# Altium PCB Wearable_sensor_v2.0.PcbDoc
Units mm, origin at the board's own origin, x right, y up, seen from the top; angles counter-clockwise.
Board outline 33.5 x 18 mm, 4 copper layers (Top Layer, Layer 1, Layer 2, Bottom Layer), stack 0.66 mm thick; 54 components, 44 nets, 210 pads, 318 vias.
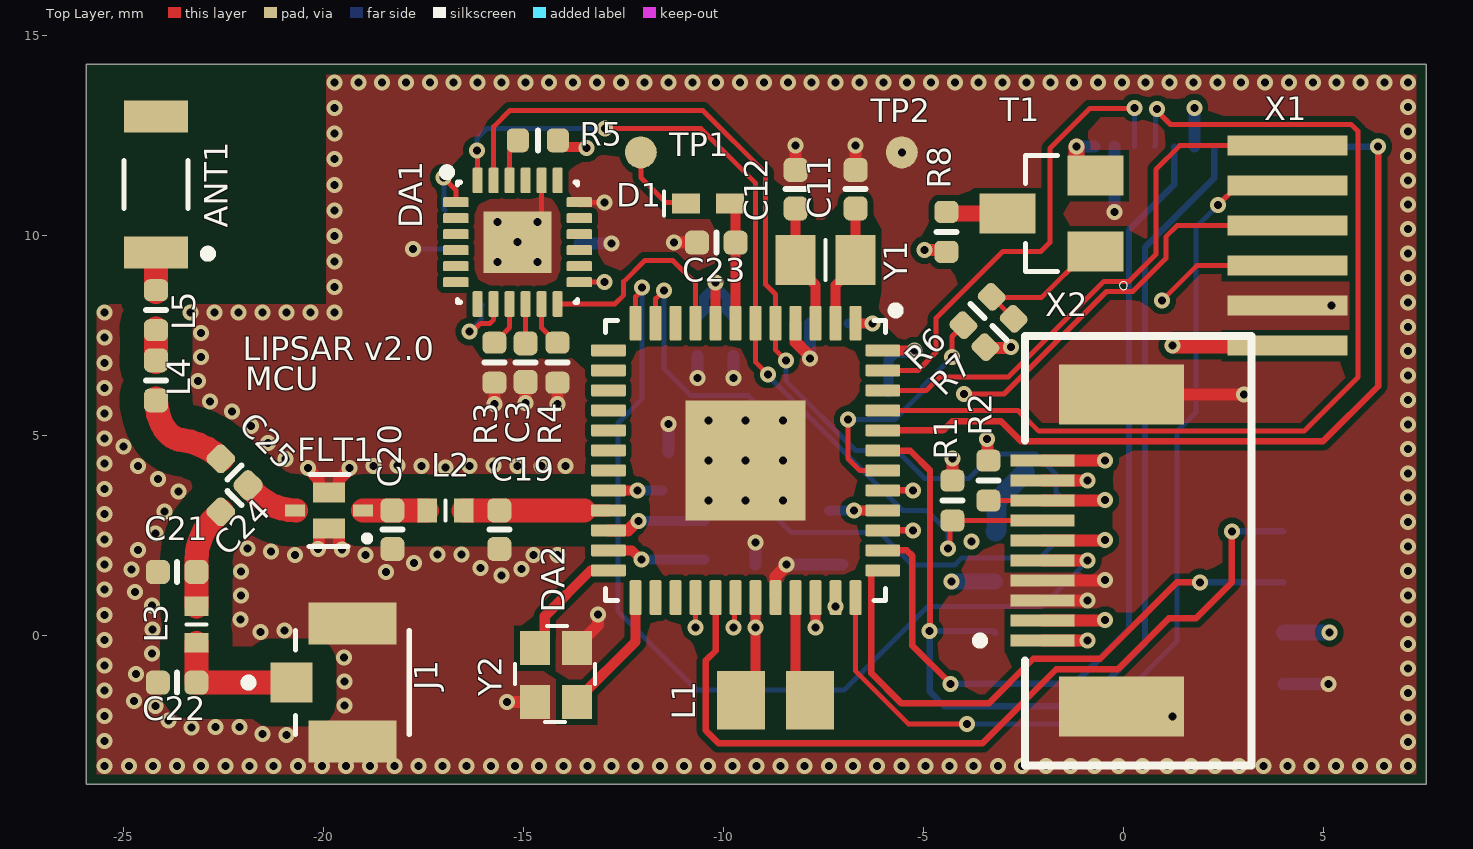
[diagram p0: Top Layer view]
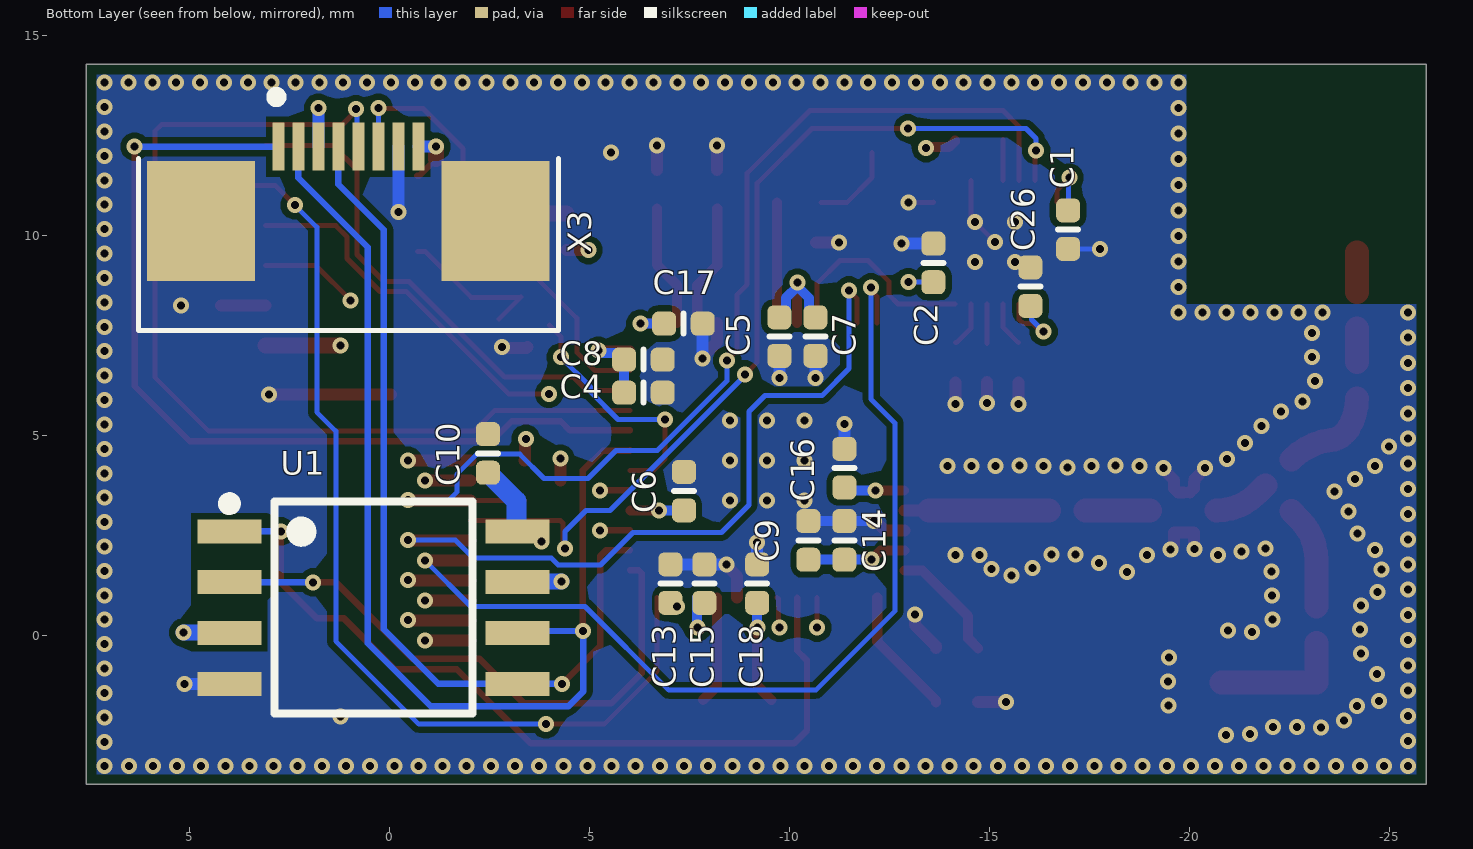
[diagram p1: Bottom Layer view, seen from below]
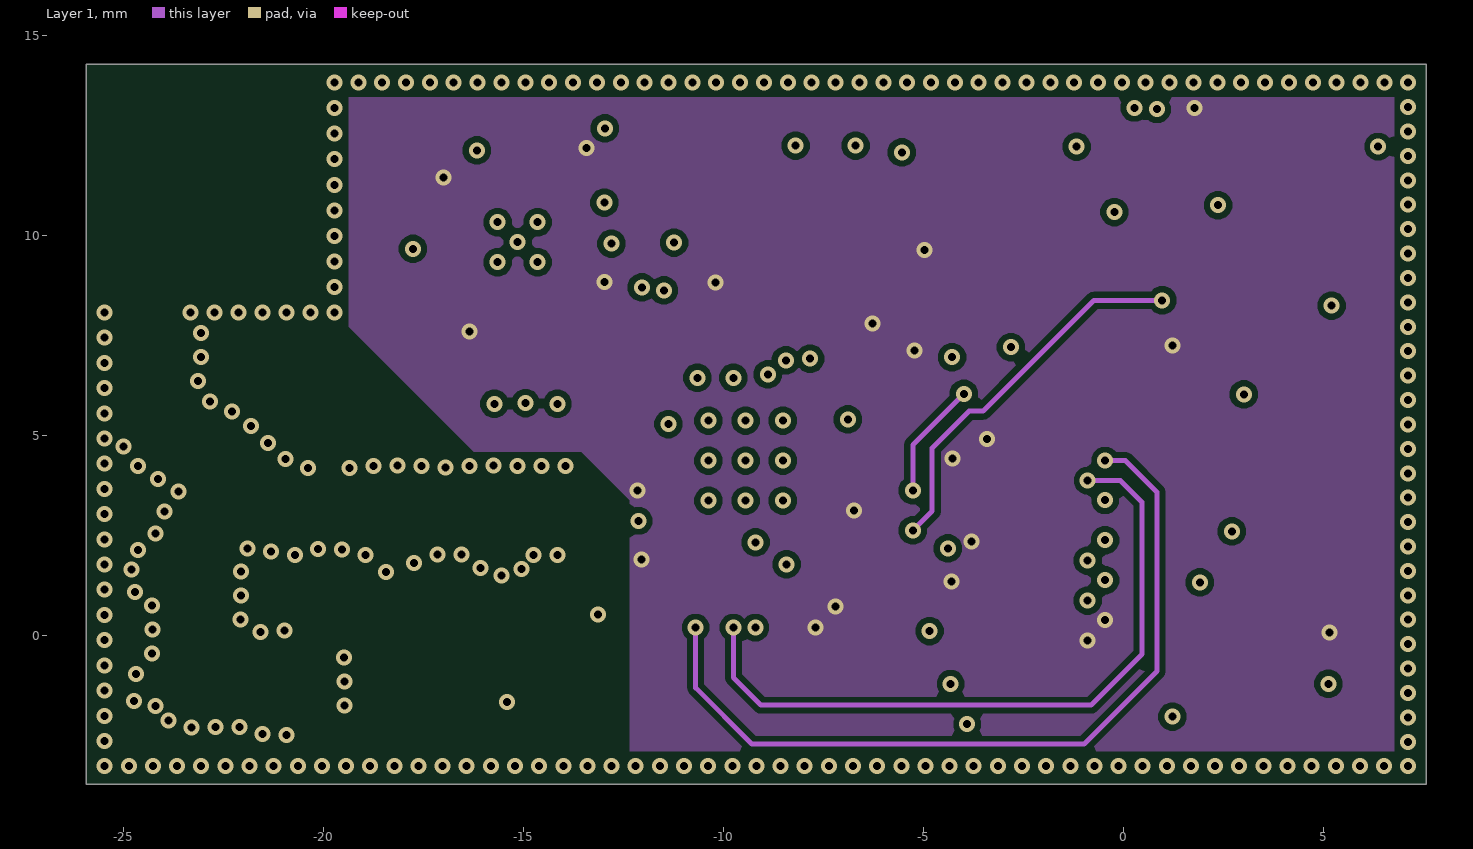
[diagram p2: Layer 1]
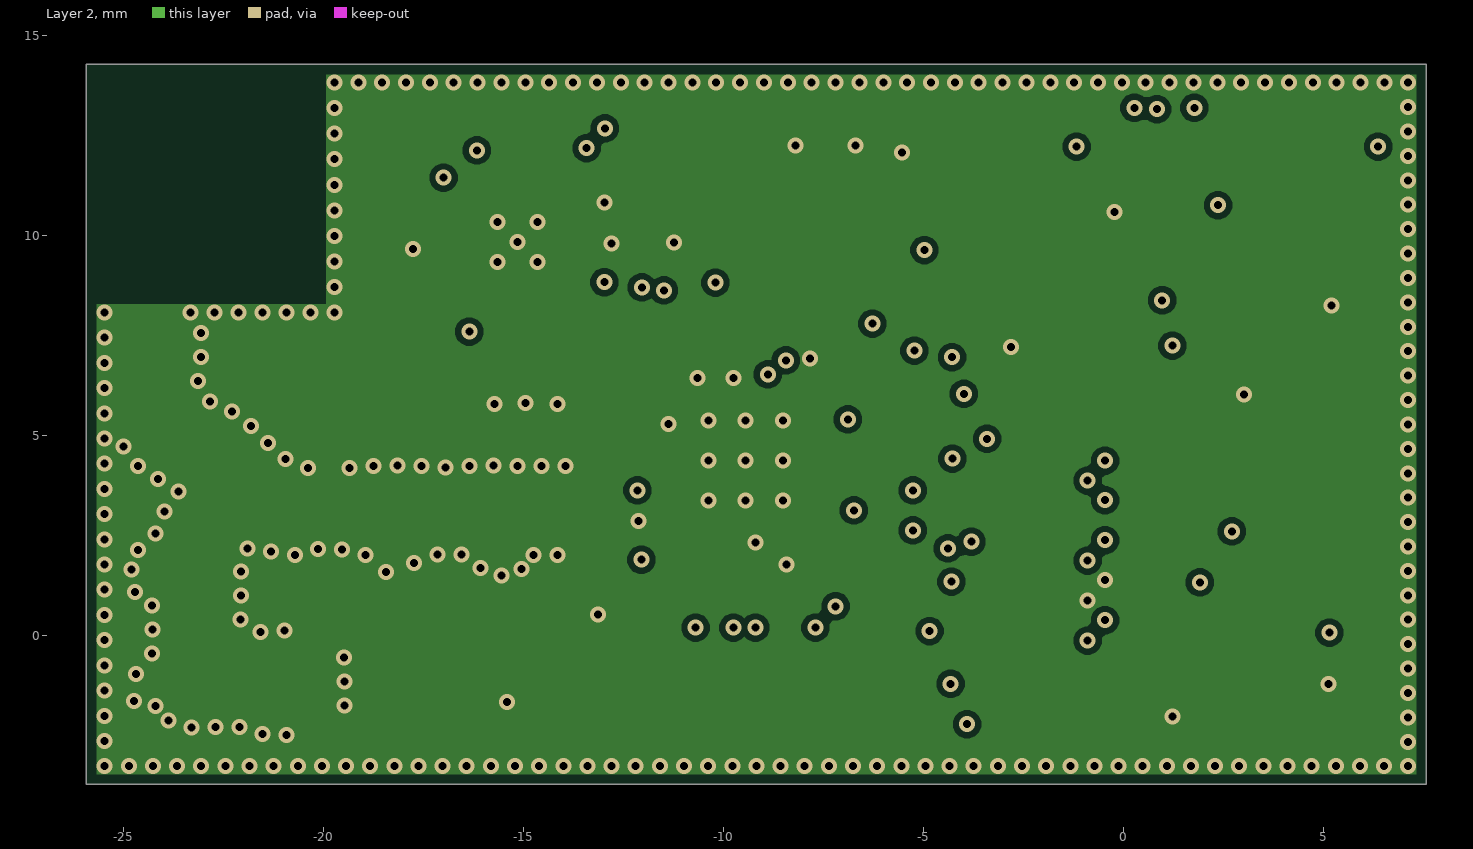
[diagram p3: Layer 2]

## Layer stack, top to bottom
Top Solder: solder mask 0.0254, SM-002, Dk 4
Top Layer: signal copper 0.045
Dielectric 2: prepreg 0.125, FR4_HiTg170 PR, Dk 5.07
Layer 1: signal copper 0.015
Dielectric 1: core 0.29, FR4 HiTg170, Dk 4.5
Layer 2: signal copper 0.015
Dielectric 3: prepreg 0.125, FR4_HiTg170 PR, Dk 5.07
Bottom Layer: signal copper 0.045
Bottom Solder: solder mask 0.0254, SM-002, Dk 4

## Board outline
-25.915,-3.73 -25.915,14.27 7.585,14.27 7.585,-3.73

## Design rules (kind name [scope] priority, off if disabled: settings)
AcuteAngle [All] p1: minimum=3.50000000000000E+0001 checktracksonly=FALSE
BoardOutlineClearance "BoardOutlineClearance 1" [Not OnSolderMask] p1: gap=0.25 ignorepadtopadclearanceinfootprint=FALSE except(0: Arc-SplitContinuation Track-SplitContinuation SMDPad-SplitContinuation THPad-SplitContinuation Via-SplitContinuation Fill-SplitContinuation Poly-SplitContinuation Region-SplitContinuation Text-SplitContinuation) // Milling
BoardOutlineClearance "BoardOutlineClearance 2" [All] p2 off: gap=0.4 ignorepadtopadclearanceinfootprint=FALSE except(0: Arc-SplitContinuation Track-SplitContinuation SMDPad-SplitContinuation THPad-SplitContinuation Via-SplitContinuation Fill-SplitContinuation Poly-SplitContinuation Region-SplitContinuation Text-SplitContinuation) // V-Cut
Clearance "Clearance-2 1/2 Oz" [All] p1: gap=0.1 ignorepadtopadclearanceinfootprint=FALSE except(0.15: Arc-Fill Arc-Poly Track-Fill Track-Poly SMDPad-SMDPad SMDPad-Fill SMDPad-Poly THPad-Fill THPad-Poly Via-Fill Via-Poly Fill-Fill Fill-Poly Poly-Poly Poly-Region Poly-Text; 0.25: Arc-Hole Track-Hole SMDPad-Hole THPad-Hole Via-Hole Fill-Hole Poly-Hole Region-Hole Text-Hole) // Advance
DiffPairsRouting "DiffPairsRouting 1 Oz" [All] p1: maxlimit=0.254 minlimit=0.2 mostfreqgap=0.254 toplayer_minwidth=0.2 toplayer_maxwidth=0.381 toplayer_prefwidth=0.381 midlayer1_minwidth=0.2 midlayer1_maxwidth=0.381 midlayer1_prefwidth=0.381 midlayer2_minwidth=0.2 midlayer2_maxwidth=0.381 midlayer2_prefwidth=0.381 bottomlayer_minwidth=0.2 bottomlayer_maxwidth=0.381 bottomlayer_prefwidth=0.381 maxuncoupledlength=12.7
DiffPairsRouting "DiffPairsRouting 1/2 Oz" [All] p2: maxlimit=0.254 minlimit=0.1 mostfreqgap=0.254 toplayer_minwidth=0.1 toplayer_maxwidth=0.381 toplayer_prefwidth=0.381 midlayer1_minwidth=0.1 midlayer1_maxwidth=0.381 midlayer1_prefwidth=0.381 midlayer2_minwidth=0.1 midlayer2_maxwidth=0.381 midlayer2_prefwidth=0.381 bottomlayer_minwidth=0.1 bottomlayer_maxwidth=0.381 bottomlayer_prefwidth=0.381 maxuncoupledlength=12.7
HoleSize "Minimum HoleSize" [IsPad] p1: absolutevalues=TRUE maxlimit=5.9 minlimit=0.6 maxpercent=80.000 minpercent=20.000
HoleSize "Minimum HoleSize VIA 2" [IsVia] p2: absolutevalues=TRUE maxlimit=5.9 minlimit=0.2 maxpercent=80.000 minpercent=20.000 // Advance
HoleToHoleClearance Hole2HoleClearance [All] p1: gap=0.25 allowstackedmicrovias=FALSE
MinimumAnnularRing "Minimum AR VIA Standart" [IsVia] p1: minimumring=0.1
MinimumAnnularRing "Minimum AR PAD Standart" [IsPAD] p2: minimumring=0.15
MinimumSolderMaskSliver "SolderMask Bridge Advance" [All] p1: minsoldermaskwidth=0.1 // Mask LDI
PlaneClearance "PlaneClearance-2 1/2 Oz" [All] p1: clearance=0.15 // Advance
PlaneConnect "TermalConnect-2 1/2 Oz" [All] p1: planeconnectstyle=Direct reliefexpansion=0.15 reliefentries=4 reliefconductorwidth=0.15 reliefairgap=0.15 // Advance
PolygonConnect "PolygonConnect-2 1/2 Oz" [All] p1: connectstyle=Direct reliefconductorwidth=0.125 reliefentries=4 polygonreliefangle="90 Angle" airgapwidth=0.15 // Advance
RoutingCorners [All] p1 off: cornerstyle=45-Degree minsetback=2.54 maxsetback=2.54
RoutingVias [All] p1: holewidth=0.2 width=0.4 viastyle="Through Hole" minholewidth=0.2 minwidth=0.4 maxholewidth=5.9 maxwidth=6.4
SilkToSilkClearance Silk2SilkClearance [All] p1 off: silktosilkclearance=0.15
SilkToSolderMaskClearance Silk2SolderMaskClearance [IsPad] p1 off: minsilkscreentomaskgap=0.15 clearancetoexposedcopper=TRUE
SolderMaskExpansion SolderMaskExpansion_via [isvia] p1: expansion=0.102 istentingtop=TRUE
SolderMaskExpansion "SolderMaskExpansion LDI" [All] p2: expansion=0.025 istentingtop=FALSE // Advance
UnRoutedNet [All] p1: checkbadconnections=TRUE
Width Width_SPI [InNet('SPI1_CLK') or InNet('SPI1_CS_FLASH')or InNet('SPI1_CS_TFT')or InNet('SPI1_MISO')or InNet('SPI1_MOSI')] p1: maxlimit=0.16 minlimit=0.14 preferedwidth=0.16 toplayer_minwidth=0.16 midlayer1_maxwidth=0.14 midlayer1_prefwidth=0.14 midlayer2_maxwidth=0.14 midlayer2_prefwidth=0.14 bottomlayer_minwidth=0.16 impedanceprofiledriven=TRUE impedanceprofileid={AFAC0996-0EC3-4B63-996B-75656DEA0BB7} impedanceprofilevalue=50.000000 minimp=50.000000 maximp=50.000000 favimp=50.000000
Width "Width 1/2 Oz" [All] p2: maxlimit=10 minlimit=0.1 preferedwidth=0.125 checkconnectedcopper=TRUE
20 further rules are at their usual default settings.

## Components (designator, comment, footprint, x,y, rotation, side; value= is the part's Value field where it differs from the comment)
ANT1 "Antenna 2.4 GHz" RFANT3216120A5T -24.175,11.27 r90 top locked
C1 "STD_CAP" CAPC1005X55N -16.957,10.14 r270 bottom value="10000 pF"
C2 "STD_CAP" CAPC1005X55N -13.59,9.308 r90 bottom value="0.1 uF"
C3 "STD_CAP" CAPC1005X55N -14.935,6.812 r270 top value="0.1 uF"
C4 "STD_CAP" CAPC1005X55N -6.34,6.065 r180 bottom value="4.7 uF"
C5 "STD_CAP" CAPC1005X55N -9.74,7.465 r270 bottom value="1.0 uF"
C6 "STD_CAP" CAPC1005X55N -7.355,3.603 r90 bottom value="0.1 uF"
C7 "STD_CAP" CAPC1005X55N -10.64,7.465 r270 bottom value="10000 pF"
C8 "STD_CAP" CAPC1005X55N -6.34,6.89 r180 bottom value="0.1 uF"
C9 "STD_CAP" CAPC1005X55N -10.465,2.37 r90 bottom value="0.1 uF"
C10 "STD_CAP" CAPC1005X55N -2.455,4.545 r90 bottom value="0.1 uF"
C11 "STD_CAP" CAPC1005X55N -6.685,11.15 r90 top value="10 pF"
C12 "STD_CAP" CAPC1005X55N -8.185,11.15 r90 top value="10 pF"
C13 "STD_CAP" CAPC1005X55N -7.015,1.29 r90 bottom value="0.1 uF"
C14 "STD_CAP" CAPC1005X55N -11.365,2.37 r90 bottom value="100 pF"
C15 "STD_CAP" CAPC1005X55N -7.865,1.29 r90 bottom value="4.7 uF"
C16 "STD_CAP" CAPC1005X55N -11.365,4.176 r90 bottom value="0.1 uF"
C17 "STD_CAP" CAPC1005X55N -7.34,7.79 r0 bottom value="0.1 uF"
C18 "STD_CAP" CAPC1005X55N -9.185,1.29 r90 bottom value="4.7 uF"
C19 "STD_CAP" CAPC1005X55N -15.59,2.637 r270 top value="0.8 pF"
C20 "STD_CAP" CAPC1005X55N -18.265,2.637 r270 top value="0.3 pF"
C21 "STD_CAP" CAPC1005X55N -23.648,1.581 r180 top value="0.8 pF"
C22 "STD_CAP" CAPC1005X55N -23.648,-1.185 r180 top value="0.3 pF"
C23 "STD_CAP" CAPC1005X55N -10.168,9.815 r180 top value="0.1 uF"
C24 "STD_CAP" CAPC1005X55N -22.215,3.427 r225 top value="0.1 uF"
C25 "STD_CAP" CAPC1005X55N -22.215,4.07 r315 top value="0.1 uF"
C26 "STD_CAP" CAPC1005X55N -16.015,8.715 r90 bottom value="10000 pF"
D1 "BAT54KFILM" SOD523 -10.38,10.795 r180 top
DA1 "IventSense_MPU-9250" "QFN24 3x3x1mm" -15.135,9.825 r0 top
DA2 "STM32WB55CC" UFQFPN48 -9.435,4.37 r270 top
FLT1 "DEA162450-1260B2" FIL_DEA160915LT-1169 -19,3.12 r180 top
J1 "CONUFL001-SMD" LINX_CONUFL001-SMD -19.265,-1.185 r270 top
L1 "MLF2012E100KT000" INDC2012X145N -8.685,-1.625 r0 top value="10 uH"
L2 "L0402" L0402 -16.94,3.12 r180 top
L3 "L0402" L0402 -23.165,0.265 r270 top
L4 "STD_IND" RESC1005X40N#1 -24.175,6.37 r90 top value="24 nH"
L5 "STD_IND" RESC1005X40N#2 -24.175,8.125 r90 top value="24 nH"
R1 "STD_RES" RESC1005X40N#2 -4.265,3.365 r90 top value="4.7 kOm"
R2 "STD_RES" RESC1005X40N#2 -3.365,3.865 r90 top value="4.7 kOm"
R3 "STD_RES" RESC1005X40N#2 -15.715,6.812 r90 top value="4.7 kOm"
R4 "STD_RES" RESC1005X40N#2 -14.14,6.812 r90 top value="4.7 kOm"
R5 "STD_RES" RESC1005X40N#2 -14.63,12.37 r180 top value="4.7 kOm"
R6 "STD_RES" RESC1005X40N#2 -3.637,8.106 r225 top value="5.62 kOm"
R7 "STD_RES" RESC1005X40N#2 -3.087,7.556 r45 top value="10 kOm"
R8 "STD_RES" RESC1005X40N#2 -4.415,10.085 r270 top value="10 Om"
T1 "BC847" SOT23 -1.79,10.54 r90 top
TP1 "Test Point" "Test point" -12.055,12.07 r180 top
TP2 "Test Point" "Test point" -5.53,12.07 r180 top
U1 "W25Q32JVSSIQ" SOIC127P790X216-8N 0.41,0.69 r180 bottom
X1 "CON6" "CON6 cabel" 4.11,7.24 r90 top
X2 "FFC 10 pin" SAMTEC_ZF5S-10-01-T-WT -0.035,2.115 r90 top
X3 "FFC 8 pin" 68710814022 1.035,10.355 r180 bottom
Y1 "NX2012SA-32.768K-STD-MUB-1_1" XTAL_NX2012SA-32.768K-STD-MUB-1 -7.435,9.375 r0 top
Y2 "NX2016_32M" NX2016_32M -14.705,-1.675 r90 top value="32 MHz"

## Footprints (in the part's own frame and the unit in brackets; to place one, negate y for a bottom-side part, rotate by r counter-clockwise, add the part's x,y. Pads: shape width x height; smd on the part's side, far side on the other; paste and mask are expansions set on the pad)
68710814022 [mm]
  rect 0.3x1.2 smd: 1(-1.75,1.86) 2(-1.25,1.86) 3(-0.75,1.86) 4(-0.25,1.86) 5(0.25,1.86) 6(0.75,1.86) 7(1.25,1.86) 8(1.75,1.86)
  rect 2.7x3 smd: S1(-3.68,0) S2(3.68,0)
  silkscreen extent -5.25,-2.74 5.25,3.23, body extent -5.2,-2.8 5.2,2.3, height 2.05
CAPC1005X55N [mm] "Chip Capacitor, 2-Leads, Body 1,0x0,5mm, IPC Medium Density"
  rrect50% 0.6x0.6 smd mask+0.05: 1(-0.483,0) 2(0.483,0)
  silkscreen extent 0,-0.25 0,0.25, body extent -0.5,-0.25 0.5,0.25, height 0.6
"CON6 cabel" [mm]
  rect 0.5x3 smd: 1(0,0) 2(1,0) 3(2,0) 4(3,0) 5(4,0) 6(5,0)
FIL_DEA160915LT-1169 [mm]
  rect 0.5x0.3 smd: 1(0,0) 3(1.7,0)
  rect 0.8x0.5 smd: 2(0.85,-0.45) 2(0.85,0.45)
  silkscreen extent -0.12,-0.9 1.35,0.9, body extent 0.05,-0.4 1.65,0.4, height 0.61
INDC2012X145N [mm]
  rect 1.2x1.47 smd: 1(-0.86,0) 2(0.86,0)
  body extent -1,-0.63 1,0.63, height 1.45
L0402 [mm]
  rect 0.49x0.6 smd: 1(-0.455,0) 2(0.455,0)
  silkscreen extent 0,-0.25 0,0.25, body extent -0.5,-0.25 0.5,0.25, height 0.44
LINX_CONUFL001-SMD [mm]
  rect 1x1.05 smd: 1(0,-1.525)
  rect 1.05x2.2 smd: 2(-1.475,0) 3(1.475,0)
  silkscreen extent -1.3,-2.7 1.3,1.42, body extent -1.55,-1.5 1.55,1.5, height 1.3
NX2016_32M [mm] "Crystal 32M"
  rect 0.85x0.75 smd: 1(0,0) 2(1.35,0) 3(1.35,-1.05) 4(0,-1.05)
  silkscreen extent -0.5,-1.5 1.9,0.5, body extent -0.29,-1.28 1.71,0.32, height 0.5
"QFN24 3x3x1mm" [mm]
  rrect25% 0.64x0.25 smd: 1(-1.545,1) 2(-1.545,0.6) 3(-1.545,0.2) 4(-1.545,-0.2) 5(-1.545,-0.6) 6(-1.545,-1) 13(1.545,-1) 14(1.545,-0.6) 15(1.545,-0.2) 16(1.545,0.2) 17(1.545,0.6) 18(1.545,1)
  rrect25% 0.25x0.64 smd: 7(-1,-1.545) 8(-0.6,-1.545) 9(-0.2,-1.545) 10(0.2,-1.545) 11(0.6,-1.545) 12(1,-1.545) 19(1,1.545) 20(0.6,1.545) 21(0.2,1.545) 22(-0.2,1.545) 23(-0.6,1.545) 24(-1,1.545)
  rect 1.7x1.54 smd paste-2: 25(0,0)
  silkscreen extent -1.86,-1.5 1.5,1.85, body extent -1.5,-1.5 1.5,1.5, height 1.05
RESC1005X40N#1 [mm] "Chip Resistor EIA 0402. METRIC 1005, 2-Leads, Body 1,0x0,5mm, IPC Medium Density"
  rrect50% 0.6x0.6 smd: 1(-0.5,0) 2(0.5,0)
  silkscreen extent 0,-0.25 0,0.25, body extent -0.5,-0.25 0.5,0.25, height 0.4
RESC1005X40N#2 [mm] "Chip Resistor EIA 0402. METRIC 1005, 2-Leads, Body 1,0x0,5mm, IPC Medium Density"
  rrect50% 0.55x0.6 smd: 1(-0.5,0) 2(0.5,0)
  silkscreen extent 0,-0.25 0,0.25, body extent -0.5,-0.25 0.5,0.25, height 0.4
RFANT3216120A5T [mm]
  rect 0.8x1.6 smd: 1(-1.7,0) 2(1.7,0)
  silkscreen extent -1.83,-1.4 0.6,0.8, body extent -1.6,-0.8 1.6,0.8, height 1.2
SAMTEC_ZF5S-10-01-T-WT [mm]
  rect 0.3x1.6 smd: 1(-2.25,1.98) 2(-1.75,1.98) 3(-1.25,1.98) 4(-0.75,1.98) 5(-0.25,1.98) 6(0.25,1.98) 7(0.75,1.98) 8(1.25,1.98) 9(1.75,1.98) 10(2.25,1.98)
  rect 1.5x3.12 smd: S1(-3.897,0) S2(3.897,0)
  silkscreen extent -5.37,-3.25 5.37,3.64, body extent -5.33,-3.25 5.33,2.42, height 2.05
SOD523 [mm]
  rect 0.7x0.5 smd: 1(0.55,0) 2(-0.55,0)
  silkscreen extent 1.1,-0.3 1.1,0.3, body extent -0.79,-0.38 0.81,0.42, height 0.65
SOIC127P790X216-8N [mm]
  rect 1.6x0.6 smd: 1(-3.6,1.905) 2(-3.6,0.635) 3(-3.6,-0.635) 4(-3.6,-1.905) 5(3.6,-1.905) 6(3.6,-0.635) 7(3.6,0.635) 8(3.6,1.905)
  silkscreen extent -3.82,-2.65 2.47,2.82, body extent -3.95,-2.64 3.95,2.64, height 2.16
SOT23 [mm]
  rect 1x1.4 smd: 1(-0.95,-1.1) 2(0.95,-1.1) 3(0,1.1)
  silkscreen extent -1.9,-1.9 1.45,0.65, body extent -1.45,-1.25 1.45,1.25, height 1.1
"Test point" [mm]
  round 0.8 smd: 1(0,0)
UFQFPN48 [mm]
  rrect25% 0.87x0.3 smd: 1(-3.43,2.75) 2(-3.43,2.25) 3(-3.43,1.75) 4(-3.43,1.25) 5(-3.43,0.75) 6(-3.43,0.25) 7(-3.43,-0.25) 8(-3.43,-0.75) 9(-3.43,-1.25) 10(-3.43,-1.75) 11(-3.43,-2.25) 12(-3.43,-2.75) 25(3.43,-2.75) 26(3.43,-2.25) 27(3.43,-1.75) 28(3.43,-1.25) 29(3.43,-0.75) 30(3.43,-0.25) 31(3.43,0.25) 32(3.43,0.75) 33(3.43,1.25) 34(3.43,1.75) 35(3.43,2.25) 36(3.43,2.75)
  rrect25% 0.3x0.87 smd: 13(-2.75,-3.43) 14(-2.25,-3.43) 15(-1.75,-3.43) 16(-1.25,-3.43) 17(-0.75,-3.43) 18(-0.25,-3.43) 19(0.25,-3.43) 20(0.75,-3.43) 21(1.25,-3.43) 22(1.75,-3.43) 23(2.25,-3.43) 24(2.75,-3.43) 37(2.75,3.43) 38(2.25,3.43) 39(1.75,3.43) 40(1.25,3.43) 41(0.75,3.43) 42(0.25,3.43) 43(-0.25,3.43) 44(-0.75,3.43) 45(-1.25,3.43) 46(-1.75,3.43) 47(-2.25,3.43) 48(-2.75,3.43)
  rect 3x3 smd paste-4: 49(0,0)
  silkscreen extent -3.85,-3.5 3.5,3.85, body extent -3.5,-3.5 3.5,3.5, height 0.6
XTAL_NX2012SA-32.768K-STD-MUB-1 [mm]
  rect 1x1.25 smd: 1(-0.75,0) 2(0.75,0)
  silkscreen extent 0,-0.5 0,0.5, body extent -1.02,-0.6 1.02,0.6, height 0.6

## Part data
ANT1: library part "Antenna 2.4"
C1 C7 C26: library part 3808, Dielectric=X7R, Manufacturer=muRata, ManufacturerPartnumber=GRM155R71H103KA88D, Temp_Range="-55 to 125°C", Voltage_Range=50V, AuthorModification_Comp=anosova, BOM="Конденсатор 0402 10000 pF ±10% 50V  X7R    GRM155R71H103KA88D muRata", Comp_Class_Name="Capacitors Chip SMD 0402", Comp_Class_Number=200003, Comp_Description="Capacitors 0402 10000 pF ±10% 50V  X7R", Comp_ID=200003-0407, ComponentLink1Description=MANUFACTURER_URL, ComponentLink1URL=http://www.murata.com/products/catalog/pdf/c02e.pdf, Footprint_Description="Chip Capacitor EIA 0402. METRIC 1005, 2-Leads, Body 1,00x0,5mm, IPC Medium Density", HelpURL=\\corp1\RNDlibrary\_Library\Altium_lib\Datasheet\muRata\Chip_Monolithic_Ceramic_Capacitors\Chip_Monolithic_Ceramic_Capacitors.pdf, Human_Readable="Конденсатор 0402 10000 pF ±10% 50V  X7R", Lib_Description=Capacitor, Number_Base=3808, Precision=±10%, Price=0,136999994516373, TimeModification_Comp="18.11.2021 13:06:28"
C2 C3 C6 C8 C9 C10 C13 C16 C17 C23: library part 5571, Dielectric=X7R, Manufacturer=muRata, ManufacturerPartnumber=GRM155R71H104KE14D, Temp_Range="-55°C to +125°C", Voltage_Range=50V, AuthorCreation_Comp=altium_lib_sch_p, AuthorModification_Comp=anosova, BOM="Конденсатор 0402 0.1 uF ±10% 50V X7R    GRM155R71H104KE14D muRata", Comp_Class_Name="Capacitors Chip SMD 0402", Comp_Class_Number=200003, Comp_Description="Capacitors 0402 0.10 uF ±10% 50V X7R", Comp_ID=200003-430, ComponentLink1Description=MANUFACTURER_URL, ComponentLink1URL=https://www.murata.com/~/media/webrenewal/support/library/catalog/products/capacitor/mlcc/c02e.ashx, Footprint_Description="Chip Capacitor EIA 0402. METRIC 1005, 2-Leads, Body 1,00x0,5mm, IPC Medium Density", HelpURL=\\corp1\RNDlibrary\_Library\Altium_lib\Datasheet\muRata\Chip_Monolithic_Ceramic_Capacitors\c02e.pdf, Human_Readable="Конденсатор 0402 0.1 uF ±10% 50V X7R", Lib_Description=Capacitor, Number_Base=5571, Precision=10%, TimeCreation_Comp="05.04.2018 11:21:57", TimeModification_Comp="18.11.2021 13:11:41", Verified=N
C4 C15 C18: library part 5279, Dielectric=X5R, Manufacturer=muRata, ManufacturerPartnumber=GRM155R60J475M, Temp_Range="-55°C to +85°C", Voltage_Range=6.3V, AuthorCreation_Comp=asergeev, AuthorModification_Comp=anosova, BOM="Конденсатор 0402 4.7 uF ±20% 6.3V X5R    GRM155R60J475M muRata", Comp_Class_Name="Capacitors Chip SMD 0402", Comp_Class_Number=200003, Comp_Description="Capacitors 0402 4.7 uF ±20% 6.3V X5R", Comp_ID=200003-427, ComponentLink1Description=MANUFACTURER_URL, ComponentLink1URL=http://psearch.murata.com/capacitor/lineup/grm/, Footprint_Description="Chip Capacitor EIA 0402. METRIC 1005, 2-Leads, Body 1,00x0,5mm, IPC Medium Density", HelpURL=\\corp1\RNDlibrary\_Library\Altium_lib\Datasheet\muRata\Chip_Monolithic_Ceramic_Capacitors\c02e.pdf, Human_Readable="Конденсатор 0402 4.7 uF ±20% 6.3V X5R", Lib_Description=Capacitor, Number_Base=5279, Precision=±20%, Price=0,100000001490116, TimeCreation_Comp="03.09.2014 18:07:40", TimeModification_Comp="18.11.2021 13:10:53", Verified=N
C5: library part 5280, Dielectric=X5R, Manufacturer=muRata, ManufacturerPartnumber=GRM155R61A105K, Temp_Range="-55°C to +85°C", Voltage_Range=10V, AuthorCreation_Comp=asergeev, AuthorModification_Comp=anosova, BOM="Конденсатор 0402 1.0 uF ±10% 10V X5R    GRM155R61A105K muRata", Comp_Class_Name="Capacitors Chip SMD 0402", Comp_Class_Number=200003, Comp_Description="Capacitors 0402 1.0 uF ±10% 10V X5R", Comp_ID=200003-428, ComponentLink1Description=MANUFACTURER_URL, ComponentLink1URL=http://psearch.murata.com/capacitor/lineup/grm/, Footprint_Description="Chip Capacitor EIA 0402. METRIC 1005, 2-Leads, Body 1,00x0,5mm, IPC Medium Density", HelpURL=\\corp1\RNDlibrary\_Library\Altium_lib\Datasheet\muRata\Chip_Monolithic_Ceramic_Capacitors\c02e.pdf, Human_Readable="Конденсатор 0402 1.0 uF ±10% 10V X5R", Lib_Description=Capacitor, Number_Base=5280, Precision=±10%, Price=0,100000001490116, TimeCreation_Comp="03.09.2014 18:19:09", TimeModification_Comp="18.11.2021 13:11:06", Verified=N
C11 C12: library part 3739, Dielectric="C0G (NP0)", Manufacturer=muRata, ManufacturerPartnumber=GRM1555C1H100GA01D, Temp_Range="25 to 125°C", Voltage_Range=50V, AuthorModification_Comp=anosova, BOM="Конденсатор 0402 10 pF ±2% 50V  C0G (NP0)    GRM1555C1H100GA01D muRata", Comp_Class_Name="Capacitors Chip SMD 0402", Comp_Class_Number=200003, Comp_Description="Capacitors 0402 10 pF ±2% 50V  C0G (NP0)", Comp_ID=200003-0338, ComponentLink1Description=MANUFACTURER_URL, ComponentLink1URL=http://www.murata.com/products/catalog/pdf/c02e.pdf, Footprint_Description="Chip Capacitor EIA 0402. METRIC 1005, 2-Leads, Body 1,00x0,5mm, IPC Medium Density", HelpURL=\\corp1\RNDlibrary\_Library\Altium_lib\Datasheet\muRata\Chip_Monolithic_Ceramic_Capacitors\Chip_Monolithic_Ceramic_Capacitors.pdf, Human_Readable="Конденсатор 0402 10 pF ±2% 50V  C0G (NP0)", Lib_Description=Capacitor, Number_Base=3739, Precision=±2%, TimeModification_Comp="18.11.2021 12:46:42"
C14: library part 3763, Dielectric="C0G (NP0)", Manufacturer=muRata, ManufacturerPartnumber=GRM1555C1H101GA01D, Temp_Range="25 to 125°C", Voltage_Range=50V, AuthorModification_Comp=anosova, BOM="Конденсатор 0402 100 pF ±2% 50V  C0G (NP0)    GRM1555C1H101GA01D muRata", Comp_Class_Name="Capacitors Chip SMD 0402", Comp_Class_Number=200003, Comp_Description="Capacitors 0402 100 pF ±2% 50V  C0G (NP0)", Comp_ID=200003-0362, ComponentLink1Description=MANUFACTURER_URL, ComponentLink1URL=http://www.murata.com/products/catalog/pdf/c02e.pdf, Footprint_Description="Chip Capacitor EIA 0402. METRIC 1005, 2-Leads, Body 1,00x0,5mm, IPC Medium Density", HelpURL=\\corp1\RNDlibrary\_Library\Altium_lib\Datasheet\muRata\Chip_Monolithic_Ceramic_Capacitors\Chip_Monolithic_Ceramic_Capacitors.pdf, Human_Readable="Конденсатор 0402 100 pF ±2% 50V  C0G (NP0)", Lib_Description=Capacitor, Number_Base=3763, Precision=±2%, Price=0,0270000007003546, TimeModification_Comp="18.11.2021 12:51:46"
C19 C21: library part 3416, Dielectric="C0G (NP0)", Manufacturer=muRata, ManufacturerPartnumber=GRM1555C1HR80WA01D, Temp_Range="25 to 125°C", Voltage_Range=50V, AuthorModification_Comp=anosova, BOM="Конденсатор 0402 0.8 pF ±0.05 pF 50V  C0G (NP0)    GRM1555C1HR80WA01D muRata", Comp_Class_Name="Capacitors Chip SMD 0402", Comp_Class_Number=200003, Comp_Description="Capacitors 0402 0.8 pF ±0.05 pF 50V  C0G (NP0)", Comp_ID=200003-0015, ComponentLink1Description=MANUFACTURER_URL, ComponentLink1URL=http://www.murata.com/products/catalog/pdf/c02e.pdf, Footprint_Description="Chip Capacitor EIA 0402. METRIC 1005, 2-Leads, Body 1,00x0,5mm, IPC Medium Density", HelpURL=\\corp1\RNDlibrary\_Library\Altium_lib\Datasheet\muRata\Chip_Monolithic_Ceramic_Capacitors\Chip_Monolithic_Ceramic_Capacitors.pdf, Human_Readable="Конденсатор 0402 0.8 pF ±0.05 pF 50V  C0G (NP0)", Lib_Description=Capacitor, Number_Base=3416, Precision=±0.05pF, TimeModification_Comp="16.11.2021 12:21:27"
C20 C22: library part 3406, Dielectric="C0G (NP0)", Manufacturer=muRata, ManufacturerPartnumber=GRM1555C1HR30WA01D, Temp_Range="25 to 125°C", Voltage_Range=50V, AuthorModification_Comp=anosova, BOM="Конденсатор 0402 0.3 pF ±0.05 pF 50V  C0G (NP0)    GRM1555C1HR30WA01D muRata", Comp_Class_Name="Capacitors Chip SMD 0402", Comp_Class_Number=200003, Comp_Description="Capacitors 0402 0.3 pF ±0.05 pF 50V  C0G (NP0)", Comp_ID=200003-0005, ComponentLink1Description=MANUFACTURER_URL, ComponentLink1URL=http://www.murata.com/products/catalog/pdf/c02e.pdf, Footprint_Description="Chip Capacitor EIA 0402. METRIC 1005, 2-Leads, Body 1,00x0,5mm, IPC Medium Density", HelpURL=\\corp1\RNDlibrary\_Library\Altium_lib\Datasheet\muRata\Chip_Monolithic_Ceramic_Capacitors\Chip_Monolithic_Ceramic_Capacitors.pdf, Human_Readable="Конденсатор 0402 0.3 pF ±0.05 pF 50V  C0G (NP0)", Lib_Description=Capacitor, Number_Base=3406, Precision=±0.05pF, TimeModification_Comp="16.11.2021 12:19:31"
C24 C25: library part 6193, Manufacturer=Yageo, ManufacturerPartnumber=CC0402KRX7R8BB104, Temp_Range="-55°C to +125°C", Voltage_Range=25V, AuthorCreation_Comp=anosova, AuthorModification_Comp=anosova, BOM="Конденсатор 0402 0.1 uF ±10% 25V X7R    CC0402KRX7R8BB104 Yageo", Comp_Class_Name="Capacitors Chip SMD 0402", Comp_Class_Number=200003, Comp_Description="Capacitors 0402 0.10 uF ±10% 25V X7R", Comp_ID=200003-432, ComponentLink1Description=MANUFACTURER_URL, ComponentLink1URL=https://www.yageo.com/upload/media/product/productsearch/datasheet/mlcc/UPY-GPHC_X7R_6.3V-to-50V_20.pdf, Footprint_Description="Chip Capacitor EIA 0402-BGA. METRIC 1005, 2-Leads, Body 1,00x0,5mm, IPC Medium Density", HelpURL=\\corp1\RNDlibrary\_Library\Altium_lib\Datasheet\Yageo\CC_X7R\CC_X7R.pdf, Human_Readable="Конденсатор 0402 0.1 uF ±10% 25V X7R", Lib_Description=Capacitor, Number_Base=6193, Precision=±10%, TimeCreation_Comp="25.10.2021 13:07:08", TimeModification_Comp="18.11.2021 13:12:19", Verified=N
D1: "Diode Schottky", Manufacturer=STMicroelectronics, Package=None, Availability=Unavailable, BOM="Diode schottky    BAT54KFILM STMicroelectronics", Footprint_Description=SOD523, Human_Readable="Diode schottky", ManufacturerPartnumber=BAT54KFILM, Price=None
DA1: library part MPU-9250, Manufacturer=InvenSense, BOM="Акселерометр    MPU-9250 InvenSense", ComponentLink1Description=Help, ComponentLink1URL="D:\HSE\Трекер физ состояния\Help\mpu9265.pdf", Footprint_Description="QFN23 3x3", Help="D:\HSE\Трекер физ состояния\Help\mpu9265.pdf", Human_Readable=Акселерометр, ManufacturerPartnumber=MPU-9250
DA2: library part STM32WB55, Manufacturer=STMicroelectronics, BOM="Микроконтроллер    STM32WB55CC STMicroelectronics", ComponentLink1Description=Help, ComponentLink1URL="D:\HSE\Трекер физ состояния\Help\stm32wb55cc.pdf", Footprint_Description=QFN48, Human_Readable=Микроконтроллер, ManufacturerPartnumber=STM32WB55CC
FLT1: "Band Pass Filter TDK DEA162450-1260B2", Manufacturer=TDK, BOM="Фильтр BLE    DEA162450-1260B2 TDK", Footprint_Description=SMD-3, Human_Readable="Фильтр BLE", ManufacturerPartnumber=DEA162450-1260B2
J1: Manufacturer="TE Connectivity", ManufacturerPartnumber=1909763-1, Package=None, Availability="In Stock", BOM="UMCC разъем    1909763-1 TE Connectivity", Check_prices=https://www.snapeda.com/parts/CONUFL001-SMD/Linx/view-part/5842340/?ref=eda, Footprint_Description=UMCC, Human_Readable="UMCC разъем", Price=None, SnapEDA_Link=https://www.snapeda.com/parts/CONUFL001-SMD/Linx/view-part/5842340/?ref=snap
L1: "10 ÂµH Shielded Multilayer Inductor 15 mA 800mOhm Max 0805 (2012 Metric)", Manufacturer=TDK, Package="0805 TDK Corporation", Availability="In Stock", BOM="MLF2012E100KT000 TDK", Check_prices=https://www.snapeda.com/parts/MLF2012E100KT000/TDK/view-part/?ref=eda, Footprint_Description="0805 TDK Corporation", ManufacturerPartnumber=MLF2012E100KT000, MF=TDK, MP=MLF2012E100KT000, Price=None, Purchase-URL=https://pricing.snapeda.com/search?q=MLF2012E100KT000&ref=eda
L2 L3: "Fixed Inductors 0402", Package="0402 Murata", Availability=Bad, Check_prices=https://www.snapeda.com/parts/LQG15HN1N5S00D/Murata/view-part/1646487/?ref=eda, MF=Murata, MP=LQG15HN1N5S00D, Price=None, SnapEDA_Link=https://www.snapeda.com/parts/LQG15HN1N5S00D/Murata/view-part/1646487/?ref=snap
L4 L5: library part 5343, Current_Range="280 mA", Manufacturer=muRata, ManufacturerPartnumber=LQW15AN24NG00, Temp_Range="-55°C to +125°C", AuthorCreation_Comp=altium_lib_sch_p, AuthorModification_Comp=altium_lib_sch_p, BOM="RF Inductor wire wound 0402 Size    LQW15AN24NG00 muRata", Comp_Class_Name="Inductances Chip", Comp_Class_Number=13010000, Comp_Description="RF Inductor wire wound 0402 Size", Comp_ID=13010000-030, ComponentLink1Description=MANUFACTURER_URL, HelpURL=\\Corp1\RNDlibrary\_Library\Altium_lib\Datasheet\muRata\Chip_Inductors\Chip_Inductors.o05e.pdf, Human_Readable="RF Inductor wire wound 0402 Size", Lib_Description="RF Inductor wire wound 0402 Size", Number_Base=5343, Precision=±2%, Price=0,239999994635582, TimeCreation_Comp="10.06.2015 18:13:48", TimeModification_Comp="10.06.2015 18:37:11", Verified=N
R1 R2 R3 R4 R5: library part 3312, Manufacturer=Yageo, ManufacturerPartnumber=RC0402JR-074K7L, Power_Range=0.0625W, Temp_Range="-55 °C to +155 °C", BOM="Резистор 0402 5% E24 4,7 кОм    RC0402JR-074K7L Yageo", Comp_Class_Name="Resistors Chip SMD 0402 5% E24", Comp_Class_Number=10000303, Comp_Description="Resistor 0402 5% E24 4.7 kOm", Comp_ID=1033-089, ComponentLink1Description=MANUFACTURER_URL, ComponentLink1URL=http://www.yageo.com/documents/recent/PYu-RC0402_51_RoHS_L_6.pdf, Footprint_Description="Chip Resistor EIA 0402. METRIC 1005, 2-Leads, Body 1,00x0,5mm, IPC Medium Density", HelpURL=\\corp1\RNDlibrary\_Library\Altium_lib\Datasheet\Yageo\RC0402\PYu-RC0402_51_RoHS_L_6.pdf, Human_Readable="Резистор 0402 5% E24 4,7 кОм", Lib_Description=Resistor, Number_Base=3312, Precision=5%, Price=0,00600000005215406, TimeModification_Comp="09.12.2011 8:02:28"
R6: library part 2911, Manufacturer=Yageo, ManufacturerPartnumber=RC0402FR-075K62L, Power_Range=0.0625W, Temp_Range="-55 °C to +155 °C", BOM="Резистор 0402 1% E96 5,62 кОм    RC0402FR-075K62L Yageo", Comp_Class_Name="Resistors Chip SMD 0402 1% E96", Comp_Class_Number=11010201, Comp_Description="Resistor 0402 1% E96 5.62 kOm", Comp_ID=11010201-361, ComponentLink1Description=MANUFACTURER_URL, ComponentLink1URL=http://www.yageo.com/documents/recent/PYu-RC0402_51_RoHS_L_6.pdf, Footprint_Description="Chip Resistor EIA 0402. METRIC 1005, 2-Leads, Body 1,00x0,5mm, IPC Medium Density", HelpURL=\\corp1\RNDlibrary\_Library\Altium_lib\Datasheet\Yageo\RC0402\PYu-RC0402_51_RoHS_L_6.pdf, Human_Readable="Резистор 0402 1% E96 5,62 кОм", Lib_Description=Resistor, Number_Base=2911, Precision=1%, Price=0,00600000005215406, TimeModification_Comp="06.12.2011 13:34:56"
R7: library part 2935, Manufacturer=Yageo, ManufacturerPartnumber=RC0402FR-0710K0L, Power_Range=0.0625W, Temp_Range="-55 °C to +155 °C", BOM="Резистор 0402 1% E96 10 кОм    RC0402FR-0710K0L Yageo", Comp_Class_Name="Resistors Chip SMD 0402 1% E96", Comp_Class_Number=11010201, Comp_Description="Resistor 0402 1% E96 10 kOm", Comp_ID=11010201-385, ComponentLink1Description=MANUFACTURER_URL, ComponentLink1URL=http://www.yageo.com/documents/recent/PYu-RC0402_51_RoHS_L_6.pdf, Footprint_Description="Chip Resistor EIA 0402. METRIC 1005, 2-Leads, Body 1,00x0,5mm, IPC Medium Density", HelpURL=\\corp1\RNDlibrary\_Library\Altium_lib\Datasheet\Yageo\RC0402\PYu-RC0402_51_RoHS_L_6.pdf, Human_Readable="Резистор 0402 1% E96 10 кОм", Lib_Description=Resistor, Number_Base=2935, Precision=1%, Price=0,00600000005215406, TimeModification_Comp="06.12.2011 13:34:56"
R8: library part 2647, Manufacturer=Yageo, ManufacturerPartnumber=RC0402FR-0710R0L, Power_Range=0.0625W, Temp_Range="-55 °C to +155 °C", BOM="Резистор 0402 1% E96 10 Ом    RC0402FR-0710R0L Yageo", Comp_Class_Name="Resistors Chip SMD 0402 1% E96", Comp_Class_Number=11010201, Comp_Description="Resistor 0402 1% E96 10 Om", Comp_ID=11010201-97, ComponentLink1Description=MANUFACTURER_URL, ComponentLink1URL=http://www.yageo.com/documents/recent/PYu-RC0402_51_RoHS_L_6.pdf, Footprint_Description="Chip Resistor EIA 0402. METRIC 1005, 2-Leads, Body 1,00x0,5mm, IPC Medium Density", HelpURL=\\corp1\RNDlibrary\_Library\Altium_lib\Datasheet\Yageo\RC0402\PYu-RC0402_51_RoHS_L_6.pdf, Human_Readable="Резистор 0402 1% E96 10 Ом", Lib_Description=Resistor, Number_Base=2647, Precision=1%, Price=0,00600000005215406, TimeModification_Comp="06.12.2011 13:34:55"
T1: "<b>NPN TRANSISTOR</b>", Package=None, Availability=Unavailable, MP=BC847, Price=None
U1: "FLASH - NOR Memory IC 32Mb _4M x 8_ SPI - Quad I/O 133MHz 8-SOIC", Manufacturer=Winbond, Package="SOIC-8 Winbond", Availability=Unavailable, BOM="SPI Flash    W25Q32JVSSIQ Winbond", Footprint_Description="SOIC-8 Winbond", Human_Readable="SPI Flash", ManufacturerPartnumber=W25Q32JVSSIQ, MF=Winbond, MP=W25Q32JVSSIQ, Price=None, SnapEDA_Link=https://www.snapeda.com/parts/W25Q32JVSSIQ/Winbond%20Electronics/view-part/596953/?ref=snap
X1: "Коннектор 6-ти контактный", Manufacturer=Connfly, ManufacturerPartnumber=PLS-4, BOM="Разъем 4 контакта    PLS-4 Connfly", Footprint_Description=PLS-4, Human_Readable="Разъем 4 контакта"
X2 X3: "FFC connector 8 pin"
Y1: "32.768 kHz Â±20ppm Crystal 12.5pF 80 kOhms 2-SMD, No Lead", Manufacturer="NDK America,", ManufacturerPartnumber=NX2012SA-32.768K-STD-MUB-1, Package="SMD-2 NDK", Availability="In Stock", BOM="32 kHz Crystal    NX2012SA-32.768K-STD-MUB-1 NDK America,", Check_prices=https://www.snapeda.com/parts/NX2012SA-32.768K-STD-MUB-1/NDK+America%252C+Inc./view-part/?ref=eda, Footprint_Description="SMD-2 NDK", Human_Readable="32 kHz Crystal", MF="NDK America,", MP=NX2012SA-32.768K-STD-MUB-1, Price=None, Purchase-URL=https://pricing.snapeda.com/search/part/NX2012SA-32.768K-STD-MUB-1/?ref=eda, SnapEDA_Link=https://www.snapeda.com/parts/NX2012SA-32.768K-STD-MUB-1/NDK+America%252C+Inc./view-part/?ref=snap
Y2: "32 MHz  Crystal", Manufacturer="NDK America,", ManufacturerPartnumber=NX2016SA-32MHZ, Package="SMD-2 NDK", Availability="In Stock", BOM="Crystal 32MHz    NX2016SA-32MHZ NDK America,", Check_prices=https://www.snapeda.com/parts/NX2012SA-32.768K-STD-MUB-1/NDK+America%252C+Inc./view-part/?ref=eda, Footprint_Description="SMD-2 NDK", Human_Readable="Crystal 32MHz", MF="NDK America,", MP=NX2012SA-32.768K-STD-MUB-1, Price=None, Purchase-URL=https://pricing.snapeda.com/search/part/NX2012SA-32.768K-STD-MUB-1/?ref=eda, SnapEDA_Link=https://www.snapeda.com/parts/NX2012SA-32.768K-STD-MUB-1/NDK+America%252C+Inc./view-part/?ref=snap

## Via types
v1: diameter 0.4, hole 0.2, Top Layer to Bottom Layer, tented both sides, 318 vias

## Nets (pads, with @x,y where several pads share a name; then routed paths per layer and width w, separated by ;. In a path a pad name is that pad's centre, name@x,y a point inside that pad or via, vN(x,y) a via of type N, cw(c..) or ccw(c..) an arc to the next point about the centre after c; other vN are vias at no path point)
3V3: C1.1 C2.1 C4.1 C5.1 C6.1 C7.1 C8.1 C9.1 C10.1 C13.1 C14.1 C15.1 C16.1 C17.2 C26.1 DA1.1 DA1.8 DA1.13 DA2.1 DA2.8 DA2.20 DA2.23 DA2.34 DA2.35 DA2.40 DA2.48 R1.2 R2.2 R5.1 R8.2 U1.3 U1.7 U1.8 X1.1 X2.1 X2.2 X3.3 | length 30.5
  Top Layer w0.125: v1(-16.987,11.438) -16.68,11.132 DA1.1 ; v1(-16.344,7.591) -16.27,7.591 -16.063,7.797 -15.828,7.797 -15.735,7.89 DA1.8 ; DA1.13@-13.577,8.831 -13.576,8.832 -12.898,8.832 v1@-12.89,8.84 ; DA2.20 DA2.20@-12.855,3.63 ; v1@-12.15,3.63 v1@-12.14,3.64 ; v1@-6.73,3.1 v1@-6.72,3.11 ; DA2.1 DA2.1@-6.675,7.79 ; DA2.40@-6.015,3.11 DA2.40
  Top Layer w0.25: DA2.23 -12.273,2.12 v1(-12.04,1.887) ; DA2.20@-12.855,3.62 v1@-12.15,3.62 ; v1(-10.19,8.815) -10.185,8.81 DA2.8 ; v1(-7.69,0.19) -7.685,0.195 DA2.34 ; v1(-7.185,0.722) DA2.35 ; v1@-6.72,3.12 DA2.40@-6.015,3.12 ; DA2.1@-6.675,7.79 v1(-6.265,7.79) ; DA2.48 -5.22,7.12 v1(-5.215,7.115)
  Top Layer w0.254: R5.1 -14.13,12.351 -13.983,12.203 -13.983,12.206 -13.438,12.206 v1(-13.41,12.178)
  Top Layer w0.3: v1(-4.965,9.63) R8.2@-4.415,9.63 ; R1.2 v1(-4.265,4.415) ; v1(-3.4,4.909) -3.382,4.892 -3.382,4.382 R2.2 ; X2.1 v1(-0.885,-0.135) ; X2.2 -0.46,0.365 v1(-0.45,0.375)
  Top Layer w0.4: v1(1.235,7.24) X1.1@3.11,7.24
  Bottom Layer w0.125: v1(-16.987,11.438) -16.972,11.423 -16.972,10.638 C1.1 ; v1(-16.344,7.591) -16.04,7.895 -16.04,8.235 C26.1@-16.015,8.26 ; C2.1@-13.59,8.821 -13.579,8.832 -12.898,8.832 v1@-12.89,8.84
  Bottom Layer w0.25: v1(-12.14,3.62) C16.1@-11.515,3.62 ; v1(-12.04,1.887) C9.1 ; C7.1 -10.48,8.107 -10.48,8.43 v1@-10.19,8.72 ; v1(-10.19,8.815) v1@-10.19,8.72 ; C5.1 -9.899,8.107 -9.899,8.43 v1@-10.19,8.72 ; v1@-7.685,0.195 C15.1@-7.685,0.94 ; C6.1 v1(-6.73,3.12) ; v1(-7.185,0.722) C13.1@-7.185,0.94 ; C17.2 v1(-6.265,7.79) ; C4.1 C8.1 -5.698,7.049 -5.321,7.049 -5.256,7.115 v1(-5.215,7.115)
  Bottom Layer w0.3: v1@1.769,13.187 v1@1.777,13.178 ; X3.3 v1(1.785,13.187)
  Bottom Layer w0.4: v1(-4.29,1.34) U1.7@-3.205,1.34 ; U1.3@4.02,0.065 v1(5.16,0.065)
  Bottom Layer w0.5: U1.8 -3.165,2.62 -3.165,3.352 C10.1
  other v1: -3.792,2.338 -12.965,8.825
AD0: DA1.9 R3.2 | length 1.1
  Top Layer w0.125: R3.2 -15.335,7.692 DA1.9
Antenna: C19.1 DA2.21 L2.1 | length 3.6
  Top Layer w0.3: -13.477,3.12 DA2.21
  Top Layer w0.6: L2.1 C19.1 -13.477,3.12
FSYNC: DA1.11 R4.2 | length 1.1
  Top Layer w0.125: DA1.11 -14.535,7.682 -14.165,7.312 R4.2
GND: C1.2 C2.2 C3.2 C4.2 C5.2 C6.2 C7.2 C8.2 C9.2 C10.2 C11.2 C12.2 C13.2 C14.2 C15.2 C16.2 C17.1 C18.2 C19.2 C20.2 C21.2 C22.2 C23.2 C26.2 DA1.18 DA1.20 DA1.25 DA2.4 DA2.22 DA2.32 DA2.49 FLT1.2 J1.2 J1.3 R3.1 R4.1 R7.1 TP2.1 U1.4 X1.2 X2.3 X2.4 X2.S1 X2.S2 X3.7 X3.S1 X3.S2 Y2.1 Y2.3 | length 31.3
  Top Layer w0.125: v1(-15.135,9.825) -14.535,10.425 DA1.20 ; DA1.18 -13.585,10.82 -12.97,10.82 v1(-12.965,10.815)
  Top Layer w0.3: v1(-20.374,4.187) -20.374,4.16 -20.117,3.903 -20.117,3.839 -20.1,3.822 -20.1,3.67 FLT1.2@-20.001,3.571 ; v1(-20.12,2.159) -20.101,2.178 -20.101,2.419 ; -20.1,2.42 -20.1,2.57 -19.6,2.57 -19.6,2.251 -19.52,2.171 v1(-19.52,2.144) ; FLT1.2@-19.85,3.57 -19.7,3.57 -19.6,3.67 -19.6,3.884 -19.337,4.147 v1(-19.337,4.175) ; v1(-15.715,5.785) R3.1 ; v1(-15.4,-1.675) Y2.1 ; v1(-14.935,5.802) C3.2 ; v1(-14.14,5.785) R4.1 ; Y2.3 -13.655,-0.275 -13.13,0.25 v1(-13.13,0.52) ; DA2.22 -12.375,2.62 -12.137,2.858 v1(-12.11,2.858) ; v1(-11.225,9.815) C23.2 ; DA2.32 -8.685,1.473 -8.412,1.746 v1(-8.412,1.773) ; DA2.4 -8.185,7.332 v1@-7.93,7.077 ; C12.2 v1(-8.185,12.24) ; C11.2 v1(-6.685,12.24) ; R7.1 -3.423,7.184 -2.82,7.184 v1(-2.802,7.202) ; X2.3 v1(-0.885,0.865) ; X2.4 -0.46,1.365 v1(-0.45,1.375) ; X2.S2 1.982,6.012 1.985,6.015 3.015,6.015 v1(3.02,6.02) ; X1.2@3.11,8.24 4.215,8.24 X1.2@4.22,8.245
  Bottom Layer w0.125: v1@-17.728,9.657 C1.2@-16.981,9.657
  Bottom Layer w0.25: v1(-12.11,2.858) -12.107,2.855 -11.368,2.855 C14.2 C9.2
  Bottom Layer w0.3: C2.2 v1(-12.79,9.79) ; C16.2@-11.365,4.585 C16.2@-11.362,4.588 ; C16.2@-11.365,4.588 C16.2 v1@-11.365,5.278 ; v1@-11.362,5.278 v1@-11.36,5.28 ; v1(-10.64,6.435) C7.2 ; v1(-9.74,6.435) C5.2 ; C18.2 v1(-9.185,2.32) ; v1(-8.412,1.773) C15.2 C13.2 ; v1(-7.823,6.913) C17.1 ; v1(-0.215,10.58) X3.7 ; U1.4 v1(5.135,-1.215)
  other v1: -25.46,-3.275 -24.856,-3.275 -24.253,-3.275 -23.649,-3.275 -23.046,-3.275 -22.442,-3.275 -21.839,-3.275 -21.235,-3.275 -20.632,-3.275 -20.028,-3.275 -19.425,-3.275 -18.821,-3.275 -18.218,-3.275 -17.614,-3.275 -17.011,-3.275 -16.407,-3.275 -15.804,-3.275 -15.2,-3.275 -14.597,-3.275 -13.993,-3.275 -13.39,-3.275 -12.786,-3.275 -12.183,-3.275 -11.579,-3.275 -10.976,-3.275 -10.372,-3.275 -9.769,-3.275 -9.165,-3.275 -8.562,-3.275 -7.958,-3.275 -7.354,-3.275 -6.751,-3.275 -6.147,-3.275 -5.544,-3.275 -4.94,-3.275 -4.337,-3.275 -3.733,-3.275 -3.13,-3.275 -2.526,-3.275 -1.923,-3.275 -1.319,-3.275 -0.716,-3.275 -0.112,-3.275 0.491,-3.275 1.095,-3.275 1.698,-3.275 2.302,-3.275 2.905,-3.275 3.509,-3.275 4.112,-3.275 4.716,-3.275 5.319,-3.275 5.923,-3.275 6.526,-3.275 7.13,-3.275 7.13,-2.665 -25.46,-2.645 -20.91,-2.492 -21.51,-2.466 -23.285,-2.304 -22.685,-2.298 -22.086,-2.298 -23.858,-2.126 7.13,-2.054 1.235,-2.035 -25.46,-2.014 -24.185,-1.775 -19.468,-1.761 -24.724,-1.65 7.13,-1.444 -25.46,-1.384 -19.458,-1.161 -24.681,-0.966 7.13,-0.834 -25.46,-0.754 -19.474,-0.561 -24.278,-0.451 7.13,-0.223 -25.46,-0.124 -21.557,0.081 -20.959,0.122 -24.26,0.148 -22.069,0.395 7.13,0.387 -25.46,0.507 -24.278,0.748 -22.052,0.994 7.13,0.998 -24.695,1.084 -25.46,1.137 -15.537,1.491 -18.425,1.575 -22.046,1.594 7.13,1.608 -24.791,1.645 -15.038,1.659 -16.065,1.682 -25.46,1.767 -17.73,1.8 -20.701,2.009 -18.936,2.007 -17.136,2.015 -16.536,2.013 -14.736,2.007 -14.136,2.007 -21.295,2.088 -24.631,2.132 -21.889,2.174 7.13,2.218 -25.46,2.397 -24.186,2.541 7.13,2.829 -25.46,3.028 -23.962,3.098 -10.365,3.365 -9.435,3.365 -8.505,3.365 7.13,3.439 -23.617,3.589 -25.46,3.658 -24.126,3.908 7.13,4.049 -16.941,4.199 -18.74,4.233 -17.54,4.233 -16.342,4.233 -15.142,4.233 -14.542,4.233 -13.942,4.233 -24.628,4.237 -18.14,4.239 -15.742,4.239 -25.46,4.288 -10.365,4.365 -9.435,4.365 -8.505,4.365 -20.934,4.401 7.13,4.66 -24.984,4.719 -21.379,4.803 -25.46,4.919 -21.797,5.234 7.13,5.27 -11.365,5.28 -10.365,5.365 -9.435,5.365 -8.505,5.365 -25.46,5.549 -22.278,5.593 -22.821,5.847 7.13,5.88 -25.46,6.179 -23.131,6.361 7.13,6.491 -25.46,6.809 -23.056,6.957 7.13,7.101 -25.46,7.44 -23.057,7.557 7.13,7.711 -25.46,8.07 -23.315,8.07 -22.715,8.07 -22.115,8.07 -21.515,8.07 -20.915,8.07 -20.315,8.07 -19.715,8.07 5.215,8.24 7.13,8.322 -19.715,8.708 7.13,8.932 -15.635,9.325 -14.635,9.325 -19.715,9.347 7.13,9.542 -17.752,9.657 -19.715,9.985 7.13,10.153 -15.635,10.325 -14.635,10.325 -19.715,10.623 7.13,10.763 -19.715,11.262 7.13,11.374 -19.715,11.9 7.13,11.984 -5.53,12.07 -19.715,12.538 7.13,12.594 -19.715,13.177 7.13,13.205 -19.715,13.815 -19.118,13.815 -18.522,13.815 -17.925,13.815 -17.329,13.815 -16.732,13.815 -16.136,13.815 -15.539,13.815 -14.943,13.815 -14.346,13.815 -13.749,13.815 -13.153,13.815 -12.556,13.815 -11.96,13.815 -11.363,13.815 -10.767,13.815 -10.17,13.815 -9.574,13.815 -8.977,13.815 -8.38,13.815 -7.784,13.815 -7.187,13.815 -6.591,13.815 -5.994,13.815 -5.398,13.815 -4.801,13.815 -4.205,13.815 -3.608,13.815 -3.011,13.815 -2.415,13.815 -1.818,13.815 -1.222,13.815 -0.625,13.815 -0.029,13.815 0.568,13.815 1.164,13.815 1.761,13.815 2.358,13.815 2.954,13.815 3.551,13.815 4.147,13.815 4.744,13.815 5.34,13.815 5.937,13.815 6.533,13.815 7.13,13.815
INT_Axel: DA1.12 DA2.9 | length 5.3
  Top Layer w0.125: DA1.12 -12.705,8.28 -12.485,8.5 -12.485,8.84 -11.955,9.37 -11.255,9.37 -10.685,8.8 DA2.9
INT_GPS: DA2.28 X2.10 | length 22.8
  Top Layer w0.125: v1(-10.685,0.19) DA2.28
  Top Layer w0.3: X2.10 v1@-0.46,4.365
  Layer 1 w0.125: v1(-10.685,0.19) -10.685,-1.315 -9.275,-2.725 -0.975,-2.725 0.85,-0.9 0.85,3.575 0.06,4.365 v1(-0.45,4.365)
INT_PULSE: DA2.30 X2.9 | length 19.6
  Top Layer w0.125: v1@-9.74,0.135 v1(-9.74,0.19) -9.712,0.218 -9.712,0.913 DA2.30
  Top Layer w0.3: X2.9 v1(-0.885,3.865)
  Layer 1 w0.125: v1(-9.74,0.19) -9.74,-1.06 -9.05,-1.75 -0.8,-1.75 0.475,-0.475 0.475,3.325 -0.065,3.865 v1(-0.885,3.865)
LED_ANODE: T1.2 X3.8 | length 1.4
  Top Layer w0.16: T1.2@-1.16,11.91 -0.74,11.49 T1.2
  Top Layer w0.4: T1.2@-1.16,11.91 v1(-1.16,12.215)
  Bottom Layer w0.3: v1(-1.16,12.215) X3.8
MCU_SCL: DA1.23 DA2.5 R2.1 X2.8 | length 27.4
  Top Layer w0.125: DA1.23 -15.735,12.714 -15.329,13.12 -10.505,13.12 -8.935,11.55 -8.935,8.77 -8.685,8.52 DA2.5 -8.685,7.125 v1(-8.43,6.87) v1@-8.33,6.87 ; R2.1 X2.8
  Top Layer w0.3: X2.8 -0.46,3.365 v1(-0.45,3.375)
  Bottom Layer w0.125: v1(-8.43,6.87) -8.43,6.362 -6.688,4.62 -5.655,4.62 -4.955,3.92 -3.855,3.92 -3.25,4.525 -2.176,4.525 -1.675,4.024 -1.675,3.575 -1.475,3.375 v1(-0.45,3.375)
MCU_SDA: DA1.24 DA2.6 R1.1 X2.7 | length 23.2
  Top Layer w0.125: v1(-16.155,12.12) -16.135,12.1 DA1.24 ; v1(-12.955,12.67) -10.555,12.67 -9.185,11.3 DA2.6 -9.185,6.825 v1(-8.88,6.52) ; v1(-4.38,2.17) -4.327,2.223 -4.327,2.803 R1.1 X2.7
  Bottom Layer w0.125: v1(-16.155,12.12) -16.155,12.42 -15.905,12.67 v1(-12.955,12.67) ; v1(-8.88,6.52) -8.88,6.493 -5.507,3.12 -4.905,3.12 -4.38,2.595 v1(-4.38,2.17)
NetANT1_1: ANT1.1 L5.2 | length 1
  Top Layer w0.6: L5.2@-24.175,8.58 ANT1.1
NetC3_1: C3.1 DA1.10 | length 1
  Top Layer w0.125: C3.1 DA1.10
NetC11_1: C11.1 DA2.2 Y1.2 | length 3.1
  Top Layer w0.25: DA2.2 -7.185,8.75 -6.685,9.25 C11.1
NetC12_1: C12.1 DA2.3 Y1.1 | length 3.1
  Top Layer w0.254: Y1.1@-8.185,9.25 -7.685,8.75 DA2.3 ; Y1.1@-8.185,9.25 C12.1
NetC20_1: C20.1 FLT1.1 L2.2 | length 1.6
  Top Layer w0.6: FLT1.1 C20.1 L2.2
NetC21_1: C21.1 C24.2 L3.1 | length 2.6
  Top Layer w0.6: L3.1 C21.1 -23.165,1.882 cw(c-21.729,1.882) -22.744,2.897 C24.2@-22.537,3.105
NetC22_1: C22.1 J1.1 L3.2 | length 3.4
  Top Layer w0.6: L3.2 C22.1 J1.1
NetC24_1: C24.1 C25.2 FLT1.3 | length 1.4
  Top Layer w0.6: C25.2@-21.893,3.748 -21.686,3.541 ccw(c-20.67,4.556) FLT1.3@-20.67,3.12
NetC25_1: C25.1 L4.1 | length 2.5
  Top Layer w0.6: L4.1@-24.175,5.915 ccw(c-22.733,5.915) -23.962,5.16 ccw(c-23.451,5.476) -23.531,4.881 cw(c-23.753,3.176) C25.1@-22.537,4.392
NetD1_1: D1.1 TP1.1 | length 2.2
  Top Layer w0.125: TP1.1 -12.055,11.445 -11.425,10.815 D1.1@-10.785,10.815
NetDA1_22: DA1.22 R5.2 | length 1
  Top Layer w0.125: DA1.22 R5.2@-15.335,12.39
NetDA2_24: DA2.24 Y2.2 | length 3
  Top Layer w0.254: Y2.2 -14.457,-0.077 -14.457,0.476 -13.313,1.62 DA2.24
NetDA2_25: DA2.25 Y2.4 | length 3.2
  Top Layer w0.254: Y2.4 -13.655,-1.625 -12.185,-0.155 DA2.25
NetDA2_33: DA2.33 L1.2 | length 2.7
  Top Layer w0.25: DA2.33 -8.185,-1.265 L1.2
NetL4_2: L4.2 L5.1 | length 0.8
  Top Layer w0.6: L4.2@-24.175,6.825 L5.1@-24.175,7.67
NetR6_1: R6.1 R7.2 T1.1 | length 3.8
  Top Layer w0.125: R6.1 R6.1@-3.271,8.446 ; R7.2 R6.1@-3.271,8.446 ; T1.1 -0.89,9.59 -2.034,8.446 R6.1@-3.271,8.446
NetR8_1: R8.1 T1.3 | length 1.5
  Top Layer w0.4: R8.1@-4.415,10.54 T1.3
NRST: C23.1 D1.2 DA2.7 | length 3
  Top Layer w0.25: DA2.7 D1.2@-9.685,10.815
PWM_LED_TFT: DA2.42 R6.2 | length 6.2
  Top Layer w0.125: v1(-6.88,5.395) -6.88,4.42 -6.58,4.12 DA2.42 ; v1(-4.275,6.95) -4.275,7.468 R6.2
  Bottom Layer w0.125: v1(-6.88,5.395) -5.705,5.395 -5.016,6.084 -5.016,6.209 v1(-4.275,6.95)
RESET_TFT: DA2.47 X3.6 | length 11.8
  Top Layer w0.125: DA2.47 -5.127,6.62 -4.675,7.072 -4.675,7.925 -3.002,9.598 -2.052,9.598 -1.83,9.819 -1.83,12.17 -0.831,13.169 0.207,13.169 v1@0.225,13.187
  Bottom Layer w0.125: X3.6 v1(0.285,13.187)
RS_TFT: DA2.45 X3.5 | length 25
  Top Layer w0.125: DA2.45 -2.626,5.62 -2.105,5.1 4.525,5.1 5.875,6.45 5.875,12.6 5.705,12.77 1.185,12.77 0.85,13.105 v1(0.85,13.15)
  Bottom Layer w0.125: X3.5 0.818,12.248 0.818,13.117 v1(0.85,13.15)
RXD1_MCU: DA2.12 X2.5 | length 24.3
  Top Layer w0.125: DA2.12 -12.185,8.466 -12.03,8.621 v1(-12.03,8.695)
  Top Layer w0.3: X2.5 v1(-0.885,1.865)
  Bottom Layer w0.125: v1(-12.03,8.695) -12.03,5.9 -12.625,5.305 -12.625,0.6 -10.65,-1.375 -6.975,-1.375 -4.88,0.72 -2.03,0.72 v1(-0.885,1.865)
RXD2_MCU: DA2.36 X1.5 | length 24.5
  Top Layer w0.125: DA2.36 -6.685,-0.9 -5.36,-2.225 v1(-3.9,-2.225) ; v1(2.375,10.75) 2.375,10.755 2.86,11.24 X1.5
  Bottom Layer w0.125: v1(-3.9,-2.225) -0.725,-2.225 1.35,-0.15 1.35,5.1 1.825,5.575 1.825,10.2 v1(2.375,10.75)
SPI1_CLK: DA2.43 U1.6 X3.2 | length 27.9
  Top Layer w0.16: DA2.43 -5.999,4.614 -5.319,4.614 -4.825,4.12 -4.825,0.115 v1(-4.835,0.105)
  Bottom Layer w0.16: U1.6 -3.24,0.105 v1(-4.835,0.105) -4.835,-1.408 -4.468,-1.775 -1.025,-1.775 0.55,-0.2 0.55,9.7 2.285,11.435 X3.2
SPI1_CS_FLASH: DA2.29 U1.1 | length 20.8
  Top Layer w0.16: DA2.29 -10.185,-0.385 -10.43,-0.63 -10.43,-2.38 -10.105,-2.705 -3.523,-2.705 -1.67,-0.852 -0.127,-0.852 1.145,0.42 1.82,0.42 2.72,1.32 v1@2.72,2.47
  Bottom Layer w0.16: v1(2.72,2.595) U1.1
SPI1_CS_TFT: DA2.44 X3.1 | length 22.9
  Top Layer w0.16: DA2.44 -4.5,5.12 -4.27,5.35 -3.05,5.35 -2.55,4.85 5,4.85 6.378,6.228 v1(6.378,12.215)
  Bottom Layer w0.16: X3.1 X3.1@2.825,12.175 ; X3.1@2.825,12.215 v1(6.378,12.215)
SPI1_MISO: DA2.37 U1.2 | length 14.7
  Top Layer w0.16: DA2.37 -6.226,1.62 -6.296,1.55 -6.296,-0.946 -5.537,-1.705 -3.355,-1.705 -2.242,-0.592 -0.567,-0.592 1.345,1.32 v1(1.92,1.32)
  Bottom Layer w0.16: v1(1.92,1.32) 4.005,1.32 U1.2
SPI1_MOSI: DA2.38 U1.5 X3.4 | length 21.9
  Top Layer w0.16: DA2.38 -5.405,2.12 -5.265,1.98 -5.265,-0.26 v1(-4.31,-1.215)
  Bottom Layer w0.16: v1(-4.31,-1.215) U1.5 -1.215,-1.215 0.15,0.15 0.15,10.14 1.285,11.275 X3.4
SWCLK: DA2.41 X1.4 | length 12.8
  Top Layer w0.125: v1(-3.98,6.033) -2.974,6.033 -0.414,8.593 0.243,8.593 1.07,9.42 1.07,9.962 1.348,10.24 X1.4@3.11,10.24
  Top Layer w0.16: DA2.41 v1(-5.255,3.62)
  Layer 1 w0.125: v1(-5.255,3.62) -5.255,4.757 v1@-3.98,6.032
SWDIO: DA2.39 X1.3 | length 12.8
  Top Layer w0.125: v1(0.98,8.374) 1.847,9.24 X1.3@3.11,9.24
  Top Layer w0.16: DA2.39 v1(-5.255,2.62)
  Layer 1 w0.125: v1(-5.255,2.62) -4.775,3.1 -4.775,4.675 -3.85,5.6 -3.5,5.6 -0.726,8.374 v1(0.98,8.374)
TXD1_MCU: DA2.11 X2.6 | length 19.1
  Top Layer w0.125: DA2.11 -11.685,8.415 v1(-11.48,8.62)
  Top Layer w0.3: X2.6 -0.46,2.365 v1(-0.45,2.375)
  Bottom Layer w0.125: v1(-11.48,8.62) -11.48,6.667 -10.808,5.995 -9.38,5.995 -8.98,5.595 -8.98,3.257 -8.293,2.57 -6.08,2.57 -5.267,1.757 -4.209,1.757 -4.042,1.925 -2.09,1.925 -1.64,2.375 v1@-0.47,2.375
TXD2_MCU: DA2.46 X1.6 | length 12.9
  Top Layer w0.125: DA2.46 -4.92,6.12 -4.582,6.457 -2.868,6.457 -0.482,8.843 0.145,8.843 0.82,9.518 0.82,11.645 1.415,12.24 X1.6@3.11,12.24
VFBSMPS: C18.1 DA2.31 L1.1 | length 3.3
  Top Layer w0.25: L1.1 -9.185,-1.265 DA2.31
  Bottom Layer w0.25: v1@-9.185,0.195 C18.1
  other v1: -9.19,0.19
pads on no net: ANT1.2 DA1.2 DA1.3 DA1.4 DA1.5 DA1.6 DA1.7 DA1.14 DA1.15 DA1.16 DA1.17 DA1.19 DA1.21 DA2.10 DA2.13 DA2.14 DA2.15 DA2.16 DA2.17 DA2.18 DA2.19 DA2.26 DA2.27

## Polygon pours and split planes (outlines as drawn)
GND on Top Layer "GND_L01_P005" (solid, pour order 5): -25.915,-3.735 -25.915,14.265 7.585,14.265 7.585,-3.735
GND on Top Layer "Top Layer-GND" (solid, pour order 7): 415 vertices, not listed, extent -25.989,-2.699 -11.413,10.984
no net on Top Solder "NONET_L01_P-001" (solid): -25.915,-3.725 -25.915,8.27 -25.09,8.27 -25.09,-2.905 6.777,-2.905 6.777,13.475 -19.355,13.475 -19.355,7.71 -22.915,7.71 -22.915,8.27 -19.915,8.27 -19.915,14.27 7.6,14.27 7.6,-3.725
no net on Top Solder (solid): -23.725,8.27 -19.875,8.27 -19.875,14.27 -25.915,14.27 -25.915,8.27 -24.625,8.27 -24.625,8.925 -25.225,8.925 -25.225,13.625 -23.125,13.625 -23.125,8.925 -23.725,8.925
no net on Bottom Solder "NONET_L01_P-001" (solid): -25.915,-3.725 -25.915,8.27 -25.09,8.27 -25.09,-2.905 6.777,-2.905 6.777,13.475 -19.355,13.475 -19.355,7.71 -22.915,7.71 -22.915,8.27 -19.915,8.27 -19.915,14.27 7.6,14.27 7.6,-3.725
no net on Bottom Solder "NONET_L01_P-001" (solid): -19.915,8.27 -19.915,14.27 -25.915,14.27 -25.915,8.27
GND on Layer 2 "GND_L03_P001" (solid, pour order 1): -25.915,-3.735 -25.915,14.265 7.585,14.265 7.585,-3.735
3V3 on Layer 1 "3V3_L02_P003" (solid, pour order 3): -25.08,-2.905 -25.08,7.62 -19.355,7.62 -19.355,13.445 6.777,13.445 6.777,-2.905
GND on Bottom Layer "GND_L04_P004" (solid, remove dead copper, pour order 4): -25.915,-3.735 -25.915,14.265 7.585,14.265 7.585,-3.735

## Other copper
Top Layer:
  pour cut-out: 409 vertices and 0 holes, not listed, extent -25.582,-2.291 -11.82,10.577
  pour cut-out: -19.915,14.27 -19.915,8.27 -25.915,8.27 -25.915,14.27
Layer 1:
  pour cut-out: -25.915,8.27 -19.915,8.27 -16.229,4.584 -13.544,4.584 -12.33,3.37 -12.33,2.77 -12.33,-3.73 -25.915,-3.73
  pour cut-out: -19.915,14.27 -19.915,8.27 -25.915,8.27 -25.915,14.27
Layer 2:
  pour cut-out: -19.915,14.27 -19.915,8.27 -25.915,8.27 -25.915,14.27
Bottom Layer:
  pour cut-out: -19.915,14.27 -19.915,8.27 -25.915,8.27 -25.915,14.27

## Silkscreen, mask and mechanical layers (free items; w line width, h text height)
Top Overlay:
  text "LIPSAR v2.0" at -22.007,6.68 h1
  text "MCU" at -21.949,5.93 h1
Board:
  the board outline again, w0.05